# Altium PCB USB_PD_Splitter.PcbDoc
Units mil, origin at the board's own origin, x right, y up, seen from the top; angles counter-clockwise.
Board outline 6000 x 4000 mil, 2 copper layers (Top Layer, Bottom Layer); 88 components, 37 nets, 212 pads, 20 vias.
Unrouted connection lines stored in the file: 71.
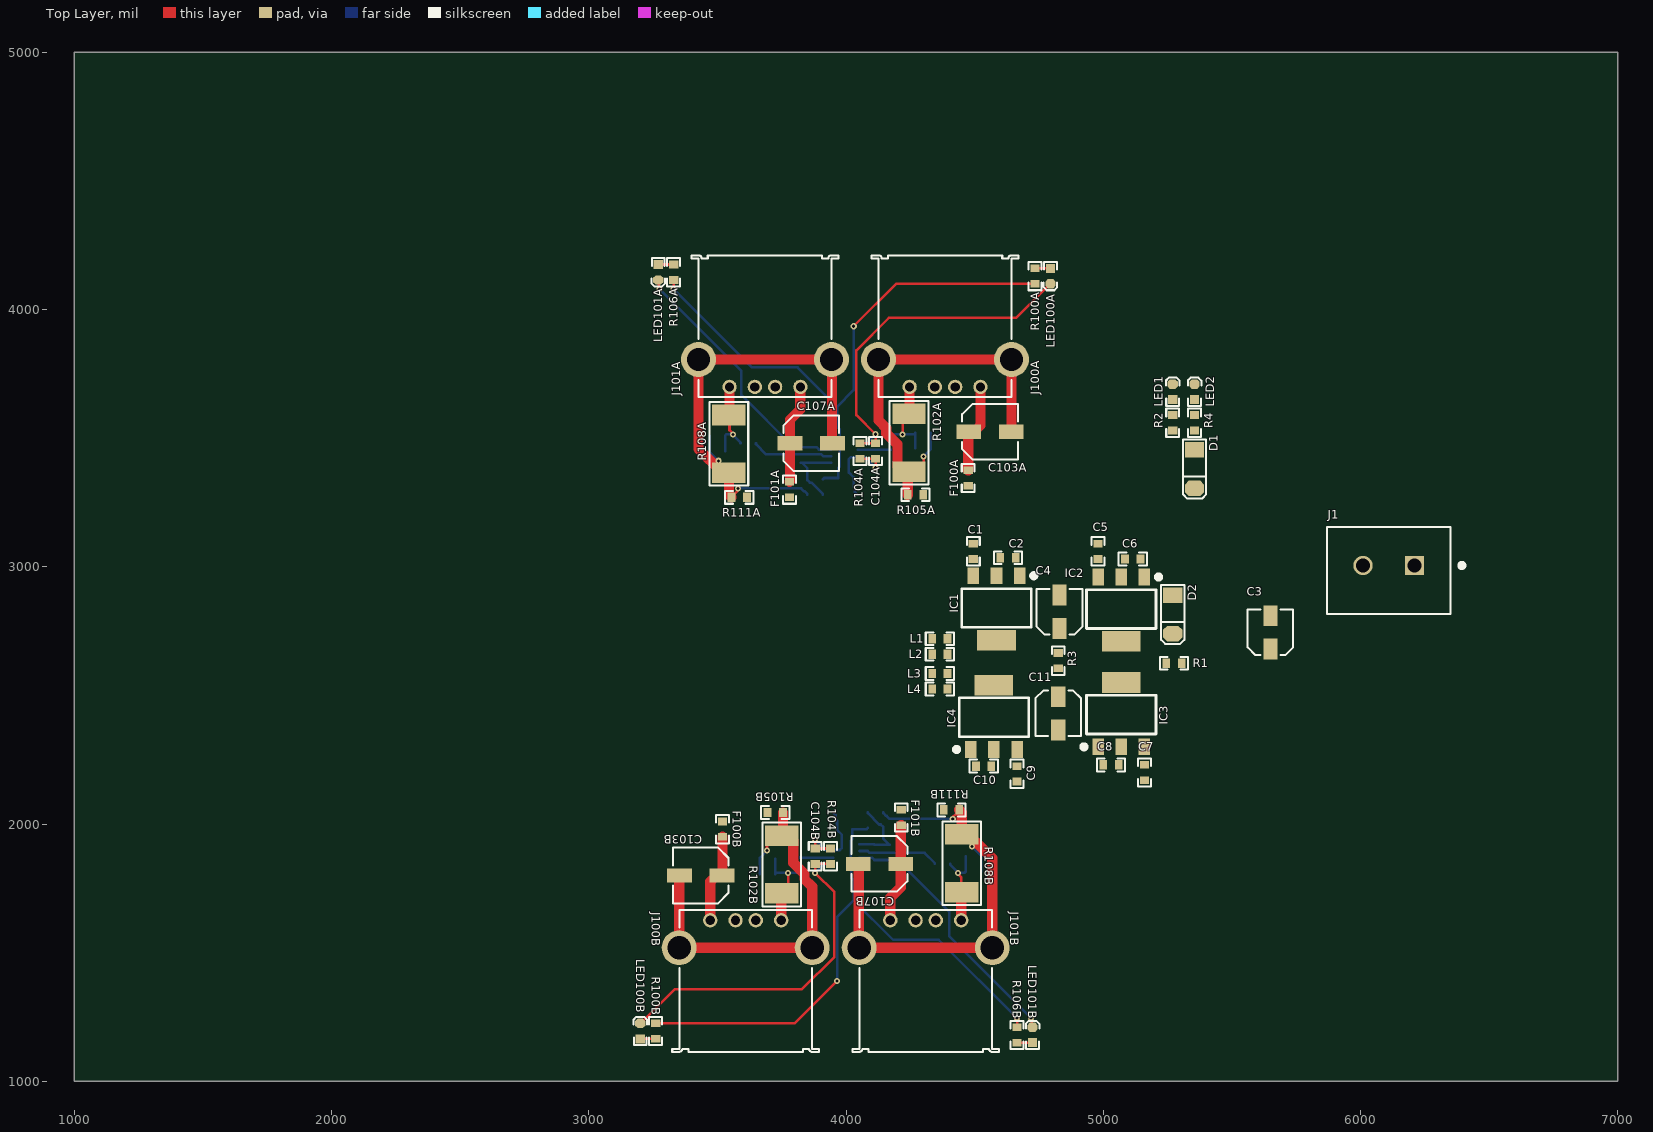
[diagram p0: Top Layer view]
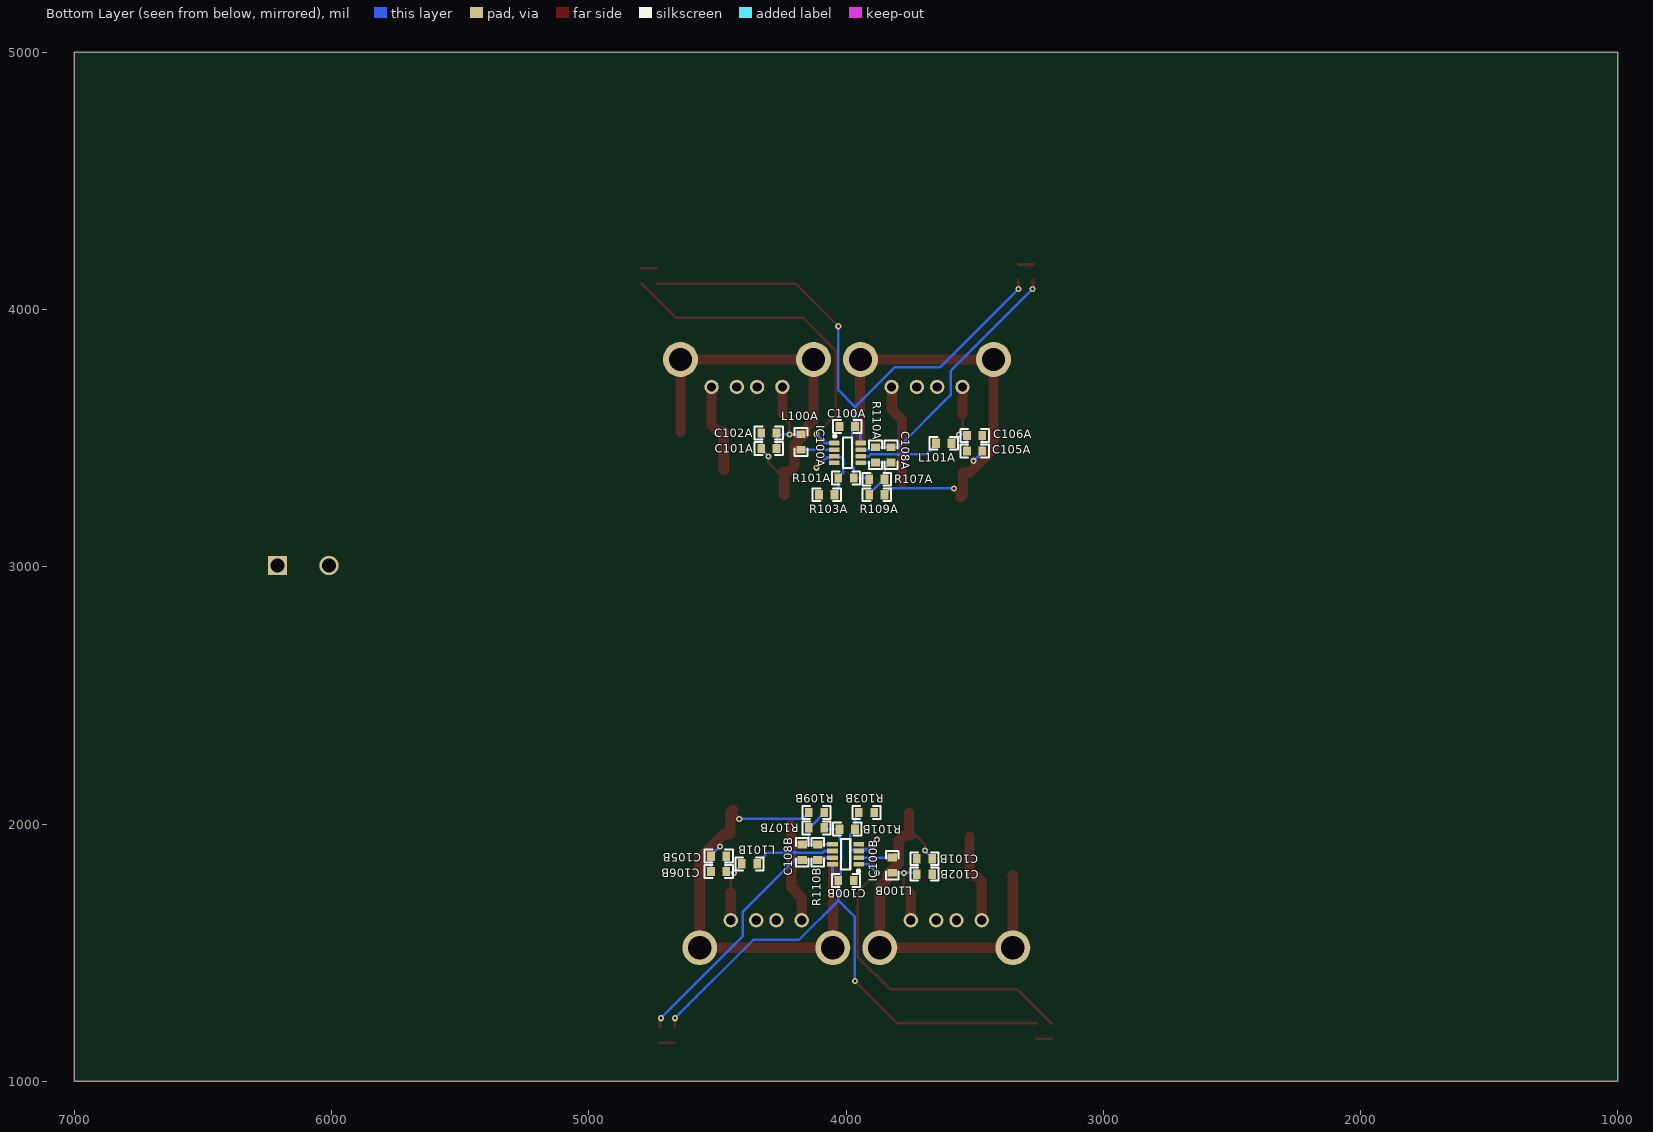
[diagram p1: Bottom Layer view, seen from below]
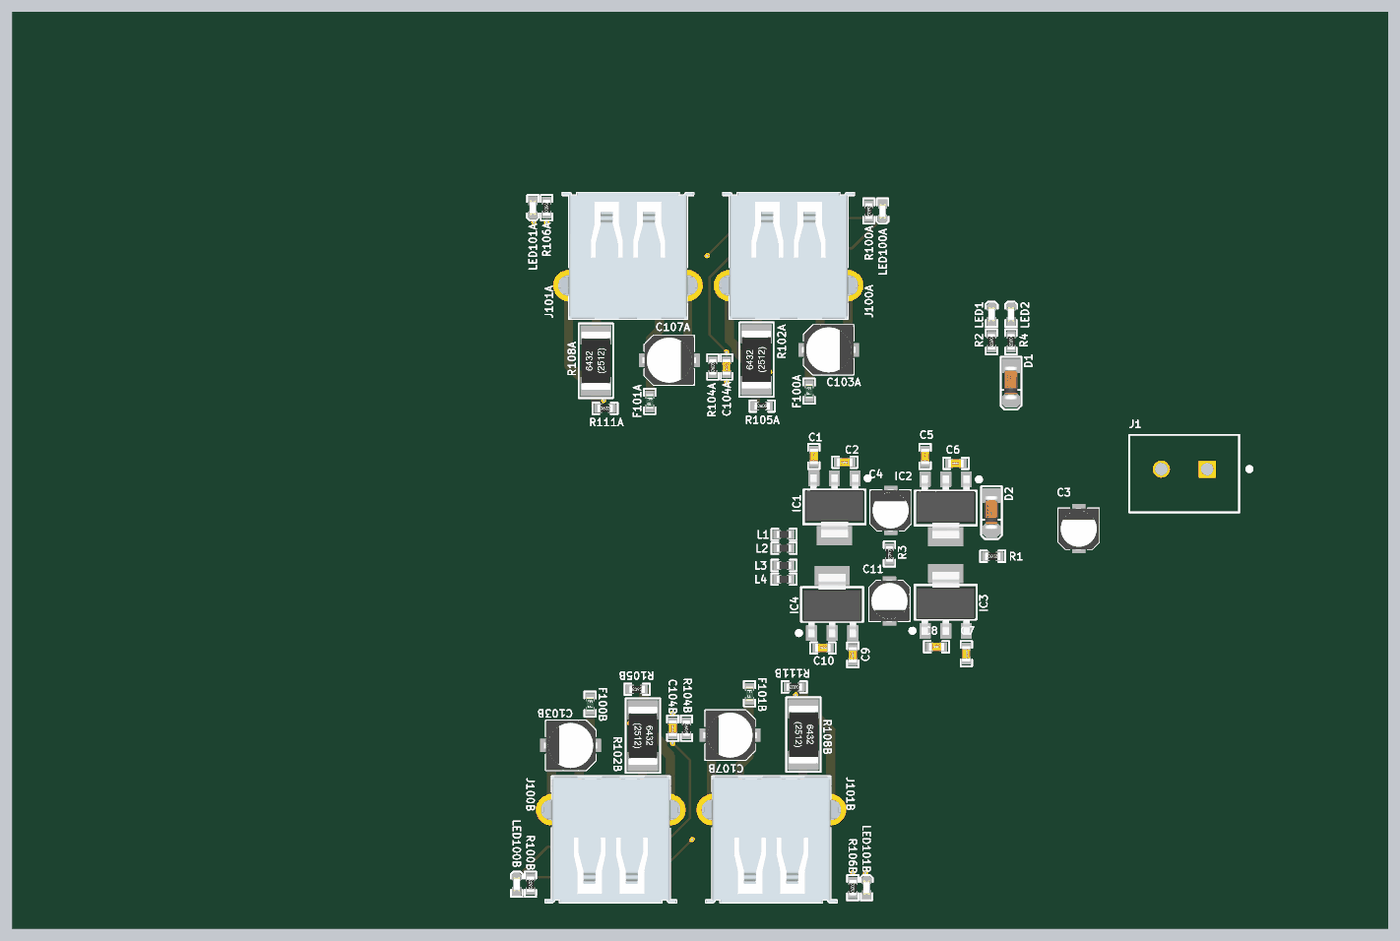
[diagram p2: 3D render of the assembled board from above, using the file's embedded part models]
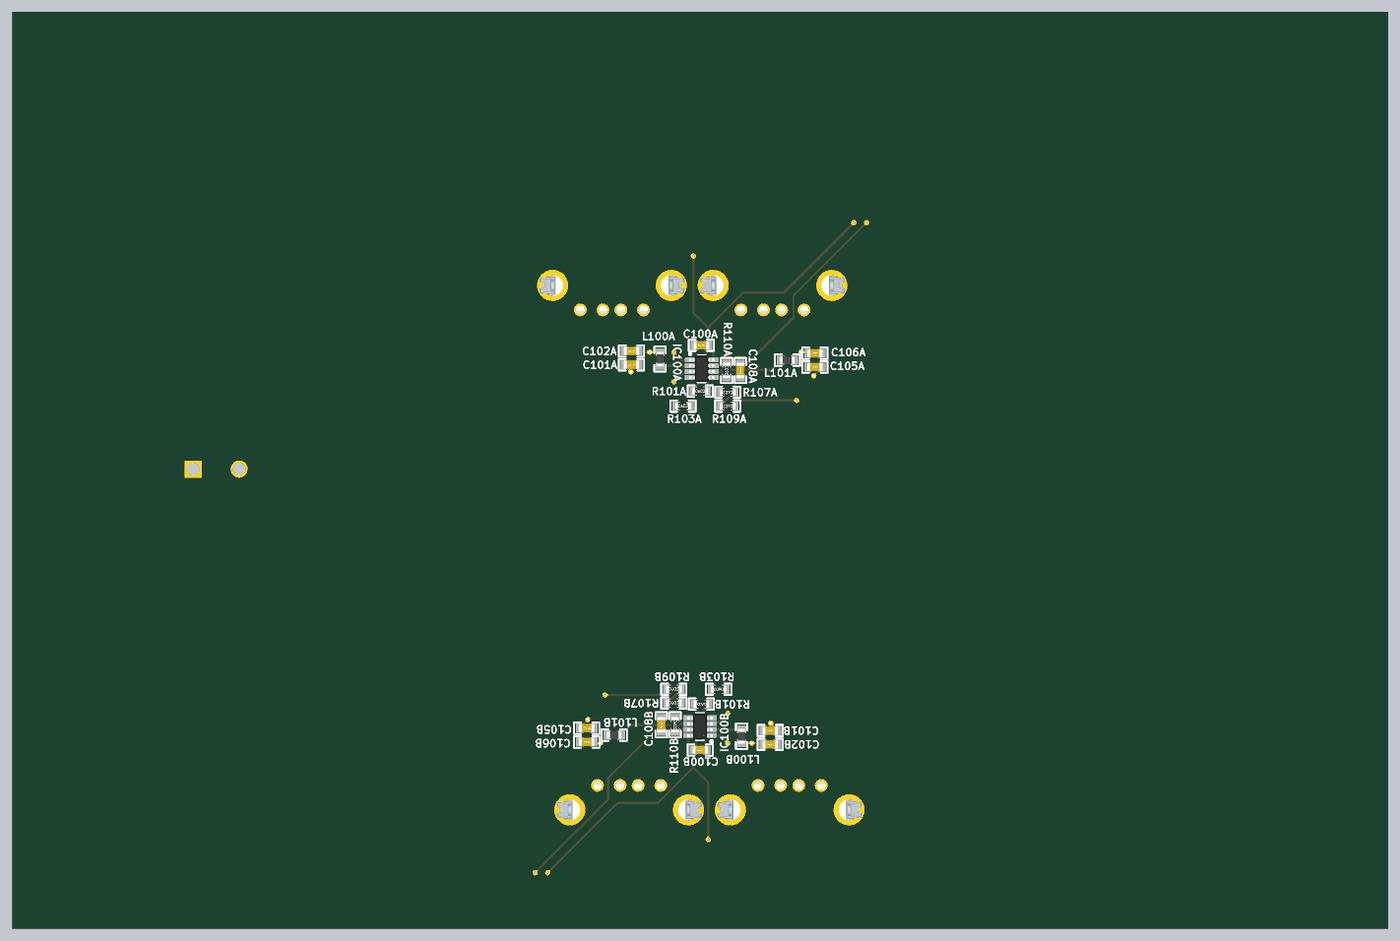
[diagram p3: 3D render of the assembled board from below, using the file's embedded part models]

## Layer stack, top to bottom
Top Solder: solder mask 0.4, Solder Resist, Dk 3.5
Top Layer: signal copper 1.4
Dielectric 1: dielectric 12.6, FR-4, Dk 4.8
Bottom Layer: signal copper 1.4
Bottom Solder: solder mask 0.4, Solder Resist, Dk 3.5

## Board outline
1000,1000 7000,1000 7000,5000 1000,5000

## Design rules (kind name [scope] priority, off if disabled: settings)
BoardOutlineClearance [All] p1: gap=7.87 ignorepadtopadclearanceinfootprint=FALSE except(15.75: Arc-SplitBarrior Arc-SplitContinuation Track-SplitBarrior Track-SplitContinuation SMDPad-SplitBarrior SMDPad-SplitContinuation THPad-SplitBarrior THPad-SplitContinuation Via-SplitBarrior Via-SplitContinuation Fill-SplitBarrior Fill-SplitContinuation Poly-SplitBarrior Poly-SplitContinuation Region-SplitBarrior Region-SplitContinuation Text-SplitBarrior Text-SplitContinuation)
Clearance [All] p1: gap=5 ignorepadtopadclearanceinfootprint=TRUE except(0: Arc-Text Track-Text Via-Text Fill-Text Poly-Text Region-Text Text-Text Text-Hole; 5.91: SMDPad-Text THPad-Text; 7.87: Arc-SMDPad Track-SMDPad; 10: Arc-Via Arc-Hole Track-Via Track-Hole SMDPad-THPad SMDPad-Via SMDPad-Hole Via-Via Via-Hole Fill-Hole Poly-Hole Region-Hole; 12.99: Arc-THPad Track-THPad THPad-Fill THPad-Poly THPad-Region Via-Fill Via-Poly Via-Region; 19.68: THPad-THPad THPad-Via THPad-Hole)
DiffPairsRouting [All] p1: maxlimit=10 minlimit=3.54 mostfreqgap=10 toplayer_minwidth=3.54 toplayer_maxwidth=15 toplayer_prefwidth=15 bottomlayer_minwidth=3.54 bottomlayer_maxwidth=15 bottomlayer_prefwidth=15 maxuncoupledlength=500
HoleSize [All] p1: absolutevalues=TRUE maxlimit=248.03 minlimit=11.81 maxpercent=80.000 minpercent=20.000
MinimumAnnularRing [All] p1: minimumring=5.12
MinimumSolderMaskSliver [All] p1: minsoldermaskwidth=3.94
PasteMaskExpansion [All] p1: expansion=1.97
PolygonConnect PolygonConnect_1 [All] p1: thpad.connectstyle=Relief thpad.reliefconductorwidth=20 thpad.reliefentries=4 thpad.polygonreliefangle="90 Angle" thpad.airgapwidth=10 smdpad.connectstyle=Relief smdpad.reliefconductorwidth=20 smdpad.reliefentries=4 smdpad.polygonreliefangle="90 Angle" smdpad.airgapwidth=10 via.connectstyle=Direct via.reliefconductorwidth=20 via.reliefentries=4 via.polygonreliefangle="90 Angle" via.airgapwidth=10
RoomDefinition Main_PDSplitter [InComponentClass('Main_PDSplitter')] p1: confinementstyle=ConfineIn formatcopy=TRUE lockcomponents=FALSE outline 4195,2105 6445,2105 6445,3855 4195,3855
RoomDefinition USB1 [InComponentClass('USB1')] p2: confinementstyle=ConfineIn formatcopy=TRUE lockcomponents=FALSE outline 3220,3230 4850,3230 4850,4240 3220,4240
RoomDefinition USB2 [InComponentClass('USB2')] p3: confinementstyle=ConfineIn formatcopy=TRUE lockcomponents=FALSE outline 4775,2095 3145,2095 3145,1085 4775,1085
RoutingCorners [All] p1: cornerstyle=Round minsetback=100 maxsetback=100
RoutingVias [All] p1: holewidth=11.81 width=17.72 viastyle="Through Hole" minholewidth=11.81 minwidth=23.62 maxholewidth=248.03 maxwidth=78.74
SilkToSilkClearance [All] p1: silktosilkclearance=3.94
SilkToSolderMaskClearance [IsPad] p1: minsilkscreentomaskgap=1.97 clearancetoexposedcopper=TRUE
SolderMaskExpansion [All] p1: expansion=1.97 istentingtop=FALSE
UnRoutedNet [All] p1: checkbadconnections=TRUE
Width [All] p1: maxlimit=787.4 minlimit=5 preferedwidth=15 minimp=50.000000 maximp=50.000000 favimp=50.000000
22 further rules are at their usual default settings.

## Classes and differential pairs
channel class Dual_USB-A: USB1 USB2
net class +5V_A[1..2]: +5V_A1 +5V_A2
component class USB2: C100B C101B C102B C103B C104B C105B C106B C107B C108B F100B F101B IC100B J100B J101B L100B L101B LED100B LED101B R100B R101B R102B R103B R104B R105B R106B R107B R108B R109B R110B R111B
component class USB1: C100A C101A C102A C103A C104A C105A C106A C107A C108A F100A F101A IC100A J100A J101A L100A L101A LED100A LED101A R100A R101A R102A R103A R104A R105A R106A R107A R108A R109A R110A R111A
component class Main_PDSplitter: C1 C2 C3 C4 C5 C6 C7 C8 C9 C10 C11 D1 D2 IC1 IC2 IC3 IC4 J1 L1 L2 L3 L4 LED1 LED2 R1 R2 R3 R4

## Components (designator, comment, footprint, x,y, rotation, side; value= is the part's Value field where it differs from the comment)
C1 "n.b." 0603_C 4495,3060 r90 top value=n.b
C2 "n.b." 0603_C 4630,3035 r0 top value=n.b
C3 "10µ_16V" CAPAE_4x5.4 5650,2745 r90 top value=10µ
C4 "n.b." CAPAE_4x5.4 4830,2825 r90 top value=n.b
C5 "n.b." 0603_C 4980,3060 r90 top value=n.b
C6 "n.b." 0603_C 5115,3030 r0 top value=n.b
C7 "n.b." 0603_C 5160,2200 r270 top value=n.b
C8 "n.b." 0603_C 5030,2230 r180 top value=n.b
C9 "n.b." 0603_C 4665,2195 r270 top value=n.b
C10 "n.b." 0603_C 4535,2225 r180 top value=n.b
C11 "n.b." CAPAE_4x5.4 4825,2430.04 r270 top value=n.b
C100A "100n_50V" 0603_C 3995,3545 r180 bottom value=100n (schematic designator C100)
C100B "100n_50V" 0603_C 4000,1780 r0 bottom value=100n (schematic designator C100)
C101A "2.2p_50V" 0603_C 4300,3460 r0 bottom value=2.2p (schematic designator C101)
C101B "2.2p_50V" 0603_C 3695,1865 r180 bottom value=2.2p (schematic designator C101)
C102A "1n_50V" 0603_C 4300,3520 r0 bottom value=1n (schematic designator C102)
C102B "1n_50V" 0603_C 3695,1805 r180 bottom value=1n (schematic designator C102)
C103A "47u_16V" CAPAE_5x5.4 4560,3525 r0 top value=47u (schematic designator C103)
C103B "47u_16V" CAPAE_5x5.4 3435,1800 r180 top value=47u (schematic designator C103)
C104A "2.2p_50V" 0603_C 4114.86,3450.15 r270 top value=2.2p (schematic designator C104)
C104B "2.2p_50V" 0603_C 3880.14,1874.85 r90 top value=2.2p (schematic designator C104)
C105A "2.2p_50V" 0603_C 3500,3450 r180 bottom value=2.2p (schematic designator C105)
C105B "2.2p_50V" 0603_C 4495,1875 r0 bottom value=2.2p (schematic designator C105)
C106A "1n_50V" 0603_C 3500,3510 r180 bottom value=1n (schematic designator C106)
C106B "1n_50V" 0603_C 4495,1815 r0 bottom value=1n (schematic designator C106)
C107A "47u_16V" CAPAE_5x5.4 3865,3480 r0 top value=47u (schematic designator C107)
C107B "47u_16V" CAPAE_5x5.4 4130,1845 r180 top value=47u (schematic designator C107)
C108A "2.2p_50V" 0603_C 3825,3435 r270 bottom value=2.2p (schematic designator C108)
C108B "2.2p_50V" 0603_C 4170,1890 r90 bottom value=2.2p (schematic designator C108)
D1 "5,6V" MINIMELF-SOD80 5355,3305 r90 top
D2 "5,6V" MINIMELF-SOD80 5270,2740 r90 top
F100A "2A" 0603_Fuse 4475,3345 r270 top (schematic designator F100)
F100B "2A" 0603_Fuse 3520,1980 r90 top (schematic designator F100)
F101A "2A" 0603_Fuse 3780,3300 r270 top (schematic designator F101)
F101B "2A" 0603_Fuse 4215,2025 r90 top (schematic designator F101)
IC1 "n.b." SOT223 4675,2965 r180 top
IC2 "n.b." SOT223 5160,2960 r180 top
IC3 "n.b." SOT223 4980,2300 r0 top
IC4 "n.b." SOT223 4485,2290 r0 top
IC100A "TLV9352" SOT23-8 3993.82,3442.8 r180 bottom (schematic designator IC100)
IC100B "TLV9352" SOT23-8 4001.18,1882.2 r0 bottom (schematic designator IC100)
J1 "3" PHOE-1755736-2_V 6110,3005 r180 top
J100A "61400416021" 61400416021 4385,3935 r180 top (schematic designator J100)
J100B "61400416021" 61400416021 3610,1390 r0 top (schematic designator J100)
J101A "61400416021" 61400416021 3685,3935 r180 top (schematic designator J101)
J101B "61400416021" 61400416021 4310,1390 r0 top (schematic designator J101)
L1 "100 Ohm @ 100MHz" 0603_L 4365,2720 r180 top
L2 "100 Ohm @ 100MHz" 0603_L 4365,2660 r180 top
L3 "100 Ohm @ 100MHz" 0603_L 4365,2585 r180 top
L4 "100 Ohm @ 100MHz" 0603_L 4365,2525 r180 top
L100A "100 Ohm @ 100MHz" 0603_L 4175,3485 r270 bottom (schematic designator L100)
L100B "100 Ohm @ 100MHz" 0603_L 3820,1840 r90 bottom (schematic designator L100)
L101A "100 Ohm @ 100MHz" 0603_L 3620,3480 r0 bottom (schematic designator L101)
L101B "100 Ohm @ 100MHz" 0603_L 4375,1845 r180 bottom (schematic designator L101)
LED1 "Orange" 0603_LED 5270,3680 r270 top
LED2 "Green" 0603_LED 5355,3680 r270 top
LED100A "Red" 0603_LED 4795,4130 r90 top (schematic designator LED100)
LED100B "Red" 0603_LED 3200,1195 r270 top (schematic designator LED100)
LED101A "Red" 0603_LED 3270,4145 r90 top (schematic designator LED101)
LED101B "Red" 0603_LED 4725,1180 r270 top (schematic designator LED101)
R1 "0" 0603_R 5275,2625 r0 top
R2 "6.8k" 0603_R 5270,3560 r270 top
R3 "0" 0603_R 4825,2635 r270 top
R4 "680" 0603_R 5355,3560 r270 top
R100A "6.8k" 0603_R 4735,4130 r270 top (schematic designator R100)
R100B "6.8k" 0603_R 3260,1195 r90 top (schematic designator R100)
R101A "47k" 0603_R 4000,3345 r180 bottom (schematic designator R101)
R101B "47k" 0603_R 3995,1980 r0 bottom (schematic designator R101)
R102A "0.18" 2512_R 4245,3370 r90 top (schematic designator R102)
R102B "0.18" 2512_R 3750,1955 r270 top (schematic designator R102)
R103A "33" 0603_R 4075,3280 r180 bottom (schematic designator R103)
R103B "33" 0603_R 3920,2045 r0 bottom (schematic designator R103)
R104A "100k" 0603_R 4054.86,3450.15 r90 top (schematic designator R104)
R104B "100k" 0603_R 3940.14,1874.85 r270 top (schematic designator R104)
R105A "0" 0603_R 4270,3280 r0 top (schematic designator R105)
R105B "0" 0603_R 3725,2045 r180 top (schematic designator R105)
R106A "6.8k" 0603_R 3330,4145 r270 top (schematic designator R106)
R106B "6.8k" 0603_R 4665,1180 r90 top (schematic designator R106)
R107A "47k" 0603_R 3880,3340 r0 bottom (schematic designator R107)
R107B "47k" 0603_R 4115,1985 r180 bottom (schematic designator R107)
R108A "0.18" 2512_R 3545,3365 r90 top (schematic designator R108)
R108B "0.18" 2512_R 4450,1960 r270 top (schematic designator R108)
R109A "33" 0603_R 3880,3280 r0 bottom (schematic designator R109)
R109B "33" 0603_R 4115,2045 r180 bottom (schematic designator R109)
R110A "100k" 0603_R 3885,3435 r90 bottom (schematic designator R110)
R110B "100k" 0603_R 4110,1890 r270 bottom (schematic designator R110)
R111A "0" 0603_R 3585,3270 r0 top (schematic designator R111)
R111B "0" 0603_R 4410,2055 r180 top (schematic designator R111)

## Footprints (in the part's own frame and the unit in brackets; to place one, negate y for a bottom-side part, rotate by r counter-clockwise, add the part's x,y. Pads: shape width x height; smd on the part's side, far side on the other; paste and mask are expansions set on the pad)
0603_C [mil] "Passiv"
  rect 30x36 smd: 1(-30,0) 2(30,0)
  silkscreen extent -55,-25 55,25, body extent -34,-19 34,18, height 35
0603_Fuse [mil] "Passiv"
  rect 30x36 smd: 1(-30,0) 2(30,0)
  silkscreen extent -55,-25 55,25, body extent -31,-16 32,16, height 25
0603_L [mil] "Passiv"
  rect 30x36 smd: 1(-30,0) 2(30,0)
  silkscreen extent -55,-25 55,25, body extent -32,-16 31,16, height 31
0603_LED [mil] "Passiv"
  oct 36x40 smd: 1(-30,0)
  rect 35x36 smd: 2(30,0)
  silkscreen extent -55,-26 55,27, body extent -32,-16 32,16, height 24
0603_R [mil] "Passiv"
  rect 30x36 smd: 1(-30,0) 2(30,0)
  silkscreen extent -55,-25 55,25, body extent -33,-16 33,16, height 22
2512_R [mil]
  rect 80x130 smd: 1(0,0) 2(225,0)
  silkscreen extent -50,-75 275,75, body extent -13,-63 238,63, height 24
61400416021 [mm] "USB 2.0 Type A Horizontal"
  round 1.42 hole 0.92: 1(-3.5,5.99) 2(-1,5.99) 3(1,5.99) 4(3.5,5.99)
  round 3.45 hole 2.3: Shell(-6.57,3.28) Shell(6.57,3.28)
  silkscreen extent -7.25,-7 7.25,7, body extent -8,-7 8,7, height 7.63
CAPAE_4x5.4 [mm] "Aluminum Electrolytic Capacitor, Body 4,30x4,30x5,40mm, IPC High Density"
  rect 2.05x1.4 smd: 1(-1.65,0) 2(1.65,0)
  silkscreen extent -2.25,-2.25 2.25,2.25, body extent -2.3,-2.25 2.3,2.25, height 5.4
CAPAE_5x5.4 [mm]
  rect 2.45x1.4 smd: 1(-2.1,0) 2(2.1,0)
  silkscreen extent -2.75,-2.75 2.75,2.75, body extent -2.95,-2.75 2.95,2.75, height 5.4
MINIMELF-SOD80 [mil] "Diode"
  rect 60x75 smd: 1(150,0)
  oct 60x75 smd: 2(0,0)
  silkscreen extent -40,-45 190,45, body extent 3,-30 149,33, height 63
PHOE-1755736-2_V [mm] "THD, 2-Leads, Body 12.16x8.6mm, Pitch 5.08mm"
  rect 1.9x1.9 hole 1.4: 1(-2.54,0)
  round 1.9 hole 1.4: 2(2.54,0)
  silkscreen extent -7.42,-3.8 6.08,4.8, body extent -6.08,-3.8 6.08,4.8, height 12
SOT23-8 [mm] "SOT23, 8-Leads, Body 2,90x2,80mm, Pitch 0,65mm, IPC High Density"
  rrect50% 1.05x0.45 smd: 1(-1.3,0.975)
  rect 1.05x0.45 smd: 2(-1.3,0.325) 3(-1.3,-0.325) 4(-1.3,-0.975) 5(1.3,-0.975) 6(1.3,-0.325) 7(1.3,0.325) 8(1.3,0.975)
  silkscreen extent -1.4,-1.5 0.45,1.78, body extent -1.4,-1.47 1.4,1.47, height 1.2
SOT223 [mil] "SOT223"
  rect 45x65 smd: 1(0,0) 2(90,0) 3(180,0)
  rect 150x80 smd: 4(90,250)
  silkscreen extent -63,-8 225,200, body extent -38,-18 218,258, height 66

## Part data
C1 C2 C5 C6 C7 C8 C9 C10 C100A C100B C101A C101B C102A C102B C104A C104B C105A C105B C106A C106B C108A C108B: library part C, "Keramikkondensator", Voltage=50V
  C1 C5 C7 C9: Designation="0603 0.1 uF 16 V ±10% Tolerance X7R SMT Multilayer Ceramic Capacitor"
C3 C4 C11 C103A C103B C107A C107B: library part "C POL", "Elko", Voltage=16V
D1 D2: library part "Zener Diode", "Zener Diode", Voltage=5,6V
F100A F100B F101A F101B: library part Fuse, "Fuse"
IC1 IC2 IC3 IC4: library part LD1117AG, "Fixedvoltage LDO, Pinassignment A", Voltage=5V, Designation="Low Dropout Regulators 5V"
IC100A IC100B: library part "Dual OP Amp", "OP / Comparator"
J1: library part CMP-2000-05300-1, "Male Header, Pitch 5.08 mm, 1 x 2 Postion, Height 12 mm, Tail Length 3.9 mm, RoHS, Bulk", Colour=Green, Manufacturer="Phoenix Contact", Manufacturer part No.=1755736, Content=250pc(s), Datasheet URL=http://www.mouser.com/ds/2/324/ItemDetail_1755736-921028.pdf, Datasheet Version=Apr-16, Industrial packaging=Yes, Manufacturer URL=http://www.phoenixcontact.com/, Number of contacts=2, Pitch=5.08mm, Type=MSTBVA2,5/2-G-5,08
J100A J100B J101A J101B: library part CMP-1502-03227-1, "USB 2.0 Type A Receptacle WR-COM, Horizontal, THT", Contact Resistance=20mOhm, Manufacturer="Wurth Elektronik", Operating Temperature=-40to105degC, Rated Current=1.5A, Working Voltage=30VAC, Connector Type=USB2.0TypeA, Datasheet URL=https://katalog.we-online.de/em/datasheet/61400416021.pdf, Gender=Receptacle, Manufacturer URL=http://www.we-online.de, Mounting Technology=THT, Orientation=Horizontal, Package Reference=61400416021, Packaging=Tray, Part Number=61400416021, Publisher=WurthElektronik
L1 L2 L3 L4 L100A L100B L101A L101B: library part L, "0,15 Ohm 1A max / 100 Ohm @ 100MHz", EBS_Nummer=10111, HelpURL=https://ebs.eti.kit.edu/Artikel/Detailansicht/10111
LED1 LED2 LED100A LED100B LED101A LED101B: library part LED, "LED"
  LED1: Color=Orange
  LED2: Color=Green
  LED100A LED100B LED101A LED101B: Color=Red
R1 R2 R3 R4 R100A R100B R101A R101B R102A R102B R103A R103B R104A R104B R105A R105B R106A R106B R107A R107B R108A R108B R109A R109B R110A R110B R111A R111B: library part R, "R"

## Via types
v1: diameter 23.62, hole 11.81, Top Layer to Bottom Layer, 20 vias

## Nets (pads, with @x,y where several pads share a name; then routed paths per layer and width w, separated by ;. In a path a pad name is that pad's centre, name@x,y a point inside that pad or via, vN(x,y) a via of type N, cw(c..) or ccw(c..) an arc to the next point about the centre after c; other vN are vias at no path point)
+5V: C2.1 C4.1 C6.1 D2.2 IC1.2 IC1.4 IC2.2 IC2.4 L1.1 L2.1 R1.1 R2.2 R3.1
+5V_A1: C100A.2 F100A.2 F101A.2 IC100A.8 L1.2 L2.2 R100A.2 R101A.2 R106A.2 R107A.2 | length 2392.3
  Top Layer w10: v1(3330,4080) R106A.2 ; v1(4030,3935) 4195,4100 R100A.2
  Bottom Layer w10: v1(3330,4080) 3635,3775 3811.94,3775 3965,3621.94 ; R107A.2 3915,3345 R101A.2 3970,3384.04 3976.18,3390.22 3976.18,3469.78 3975,3470.96 3975,3535 C100A.2 ; IC100A.8 3942.64,3519.64 3965,3542 C100A.2 ; v1(4030,3935) 4029.57,3934.57 4029.57,3686.51 3965,3621.94 ; C100A.2 3965,3621.94
+5V_A2: C100B.2 F100B.2 F101B.2 IC100B.8 L3.2 L4.2 R100B.2 R101B.2 R106B.2 R107B.2 | length 2392.3
  Top Layer w10: R100B.2 3800,1225 v1(3965,1390) ; R106B.2 v1(4665,1245)
  Bottom Layer w10: v1(3965,1390) 3965.43,1390.43 3965.43,1638.49 4030,1703.06 ; IC100B.8 4052.36,1805.36 4030,1783 C100B.2 ; R107B.2 4080,1980 R101B.2 4025,1940.96 4018.82,1934.78 4018.82,1855.22 4020,1854.04 4020,1790 C100B.2 ; v1(4665,1245) 4360,1550 4183.06,1550 4030,1703.06 ; 4030,1703.06 C100B.2
GND: C1.2 C2.2 C3.2 C4.2 C5.2 C6.2 C7.2 C8.2 C9.2 C10.2 C11.2 C100A.1 C100B.1 D2.1 IC1.1 IC2.1 IC3.1 IC4.1 IC100A.4 IC100B.4 J1.2 LED1.1 LED2.1 R105A.2 R105B.2 R111A.2 R111B.2
GND_AA: C101A.2 C102A.2 C103A.2 J100A.Shell R102A.1 R103A.1 R105A.1 | length 1590.1
  Top Layer w10: R102A.1 4267.03,3370 4302.03,3405 4302.03,3424.31 4300,3426.34 v1(4302.03,3428.37)
  Top Layer w40: R105A.1 4240,3365 R102A.1 4220,3370 4200,3390 4200,3475.87 4156.67,3519.2 4156.67,3538.91 4126.34,3569.24 4126.34,3805.87 4643.66,3805.87 4643.17,3805.37 4643.17,3525.49 C103A.2
  Bottom Layer w10: v1(4302.03,3428.37) 4302.03,3429.03 4330,3457 C101A.2 C102A.2
GND_AB: C101B.2 C102B.2 C103B.2 J100B.Shell R102B.1 R103B.1 R105B.1 | length 1590.1
  Top Layer w10: v1(3692.97,1896.63) 3695,1898.66 3692.97,1900.69 3692.97,1920 3727.97,1955 R102B.1
  Top Layer w40: C103B.2 3351.83,1799.51 3351.83,1519.63 3351.34,1519.13 3868.66,1519.13 3868.66,1755.76 3838.33,1786.09 3838.33,1805.8 3795,1849.13 3795,1935 3775,1955 R102B.1 3755,1960 R105B.1
  Bottom Layer w10: C102B.2 C101B.2 3665,1868 3692.97,1895.97 v1(3692.97,1896.63)
GND_BA: C105A.2 C106A.2 C107A.2 J101A.Shell R108A.1 R109A.1 R111A.1 | length 1950.1
  Top Layer w10: v1(3505,3412) 3505,3400 R108A.1@3540,3365 ; R111A.1 3555,3273 3577.39,3295.39 3577.39,3302.39 v1(3580,3305)
  Top Layer w40: R111A.1 3545,3280 R108A.1 3540,3365 3520,3365 3426.34,3458.66 3426.34,3805.87 3943.66,3805.87 3945.67,3803.86 3945.67,3482.01 C107A.2
  Bottom Layer w10: C106A.2 C105A.2 3470,3447 v1(3505,3412) ; v1(3580,3305) 3825,3305 3837,3293 3840,3293 3850,3283 R109A.1
GND_BB: C105B.2 C106B.2 C107B.2 J101B.Shell R108B.1 R109B.1 R111B.1 | length 1950.1
  Top Layer w10: v1(4415,2020) 4417.61,2022.61 4417.61,2029.61 4440,2052 R111B.1 ; R108B.1@4455,1960 4490,1925 v1(4490,1913)
  Top Layer w40: C107B.2 4049.33,1842.99 4049.33,1521.14 4051.34,1519.13 4568.66,1519.13 4568.66,1866.34 4475,1960 4455,1960 R108B.1 4450,2045 R111B.1
  Bottom Layer w10: R109B.1 4145,2042 4155,2032 4158,2032 4170,2020 v1(4415,2020) ; v1(4490,1913) 4525,1878 C105B.2 C106B.2
NetC8_1: C8.1 C10.1 C11.1 IC3.2 IC3.4 IC4.2 IC4.4 L3.1 L4.1 R3.2
NetC101A_1: C101A.1 C102A.1 J100A.4 L100A.1 R102A.2 | length 352.5
  Top Layer w10: v1(4220,3515) 4220,3570 R102A.2
  Top Layer w40: R102A.2 4247.2,3597.2 J100A.4
  Bottom Layer w10: L100A.1 v1(4220,3515) 4265,3515 C102A.1 C101A.1
NetC101B_1: C101B.1 C102B.1 J100B.4 L100B.1 R102B.2 | length 352.5
  Top Layer w10: R102B.2 3775,1755 v1(3775,1810)
  Top Layer w40: J100B.4 3747.8,1727.8 R102B.2
  Bottom Layer w10: C101B.1 C102B.1 3730,1810 v1(3775,1810) L100B.1
NetC103A_1: C103A.1 F100A.1 J100A.1 | length 356.1
  Top Layer w40: F100A.1 4475,3522.68 C103A.1 4497.99,3525 4522.8,3549.8 J100A.1
NetC103B_1: C103B.1 F100B.1 J100B.1 | length 356.1
  Top Layer w40: J100B.1 3472.2,1775.2 3497.01,1800 C103B.1 3520,1802.32 F100B.1
NetC104A_1: C104A.1 IC100A.1 LED100A.1 R104A.2 | length 1397.7
  Top Layer w10: R104A.2 C104A.1 v1(4114.86,3515.14) 4040.43,3589.57 4040.43,3841.45 4166.24,3967.26 4660.26,3967.26 4793,4100 LED100A.1
  Bottom Layer w10: IC100A.1 4080.9,3481.18 v1(4114.86,3515.14)
NetC104A_2: C104A.2 IC100A.3 R101A.1 R103A.2 R104A.1 | length 374.6
  Top Layer w10: R104A.1 C104A.2 4114.86,3385.14 v1(4115,3385)
  Bottom Layer w10: R103A.2 4035,3290 4035,3307 4030,3312 R101A.1 4030,3348 4011.46,3366.54 4011.46,3418.6 4019,3426.14 4041.14,3426.14 IC100A.3 4048.86,3426.14 4073.86,3426.14 v1(4115,3385)
NetC104B_1: C104B.1 IC100B.1 LED100B.1 R104B.2 | length 1397.7
  Top Layer w10: LED100B.1 3202,1225 3334.74,1357.74 3828.76,1357.74 3954.57,1483.55 3954.57,1735.43 v1(3880.14,1809.86) C104B.1 R104B.2
  Bottom Layer w10: v1(3880.14,1809.86) 3914.1,1843.82 IC100B.1
NetC104B_2: C104B.2 IC100B.3 R101B.1 R103B.2 R104B.1 | length 374.6
  Top Layer w10: v1(3880,1940) 3880.14,1939.86 C104B.2 R104B.1
  Bottom Layer w10: v1(3880,1940) 3921.14,1898.86 3946.14,1898.86 IC100B.3 3953.86,1898.86 3976,1898.86 3983.54,1906.4 3983.54,1958.46 3965,1977 R101B.1 3965,2013 3960,2018 3960,2035 R103B.2
NetC105A_1: C105A.1 C106A.1 J101A.4 L101A.1 R108A.2 | length 329
  Top Layer w10: R108A.2@3547.2,3592.2 3547.2,3531.48 3560,3518.69 v1(3560,3515)
  Top Layer w40: R108A.2@3547.2,3592.2 J101A.4
  Bottom Layer w10: C105A.1 C106A.1 3535,3515 v1(3560,3515) 3560,3513 3590,3483 L101A.1
NetC105B_1: C105B.1 C106B.1 J101B.4 L101B.1 R108B.2 | length 329
  Top Layer w10: v1(4435,1810) 4435,1806.31 4447.8,1793.52 R108B.2@4447.8,1732.8
  Top Layer w40: J101B.4 R108B.2@4447.8,1732.8
  Bottom Layer w10: L101B.1 4405,1842 4435,1812 v1(4435,1810) 4460,1810 C106B.1 C105B.1
NetC107A_1: C107A.1 F101A.1 J101A.1 | length 386.9
  Top Layer w40: F101A.1 3782.32,3332.32 C107A.1 3782.32,3570.98 3822.57,3611.22 3822.57,3698.94 J101A.1
NetC107B_1: C107B.1 F101B.1 J101B.1 | length 386.9
  Top Layer w40: J101B.1 4172.43,1626.06 4172.43,1713.78 4212.68,1754.02 C107B.1 4212.68,1992.68 F101B.1
NetC108A_1: C108A.1 IC100A.7 LED101A.1 R110A.2 | length 1021.1
  Top Layer w10: LED101A.1 3275,4110 3272.5,4107.5 3272.5,4082.5 v1(3275,4080)
  Bottom Layer w10: v1(3275,4080) 3593.15,3761.85 3593.15,3666.85 3795,3465 C108A.1 R110A.2 3894.41,3455.59 IC100A.7
NetC108A_2: C108A.2 IC100A.5 R107A.1 R109A.2 R110A.1 | length 280.4
  Bottom Layer w10: C108A.2 C108A.2@3828,3405 ; R109A.2 3910,3283 3866,3327 3860,3327 3850,3337 R107A.1 3850,3383 C108A.2@3828,3405 ; IC100A.5 3885.59,3404.41 R110A.1 C108A.2@3828,3405
NetC108B_1: C108B.1 IC100B.7 LED101B.1 R110B.2 | length 1021.1
  Top Layer w10: v1(4720,1245) 4722.5,1242.5 4722.5,1217.5 4720,1215 LED101B.1
  Bottom Layer w10: IC100B.7 4100.59,1869.41 R110B.2 C108B.1 4200,1860 4401.85,1658.15 4401.85,1563.15 v1(4720,1245)
NetC108B_2: C108B.2 IC100B.5 R107B.1 R109B.2 R110B.1 | length 280.4
  Bottom Layer w10: IC100B.5 4109.41,1920.59 R110B.1 C108B.2@4167,1920 ; R109B.2 4085,2042 4129,1998 4135,1998 4145,1988 R107B.1 4145,1942 C108B.2@4167,1920 ; C108B.2 C108B.2@4167,1920
NetD1_1: D1.1 R4.2
NetIC100A_2: IC100A.2 L100A.2 | length 130.2
  Bottom Layer w10: IC100A.2 4174.41,3455.59 L100A.2
NetIC100A_6: IC100A.6 L101A.2 | length 315.1
  Bottom Layer w10: L101A.2 3650,3477 3689.87,3437.13 3904.08,3437.13 3911.21,3430 IC100A.6
NetIC100B_2: IC100B.2 L100B.2 | length 130.2
  Bottom Layer w10: L100B.2 3820.59,1869.41 IC100B.2
NetIC100B_6: IC100B.6 L101B.2 | length 315.1
  Bottom Layer w10: IC100B.6 4083.79,1895 4090.92,1887.87 4305.13,1887.87 4345,1848 L101B.2
NetLED1_2: LED1.2 R2.1
NetLED2_2: LED2.2 R4.1
NetLED100A_2: LED100A.2 R100A.1 | length 60
  Top Layer w10: R100A.1 LED100A.2
NetLED100B_2: LED100B.2 R100B.1 | length 60
  Top Layer w10: LED100B.2 R100B.1
NetLED101A_2: LED101A.2 R106A.1 | length 60
  Top Layer w10: LED101A.2 R106A.1
NetLED101B_2: LED101B.2 R106B.1 | length 60
  Top Layer w10: R106B.1 LED101B.2
VIN: C1.1 C3.1 C5.1 C7.1 C9.1 D1.2 IC1.3 IC2.3 IC3.3 IC4.3 J1.1 R1.2
pads on no net: J100A.2 J100A.3 J100B.2 J100B.3 J101A.2 J101A.3 J101B.2 J101B.3